# Altium PCB 四路输出继电器工控板.PCBDOC (part 2 of 2)
Units mm, origin at the board's own origin, x right, y up, seen from the top; angles counter-clockwise.
Board outline 152.4 x 101.6 mm, 2 copper layers (Top Layer, Bottom Layer); 59 components, 86 nets, 225 pads, 6 vias.
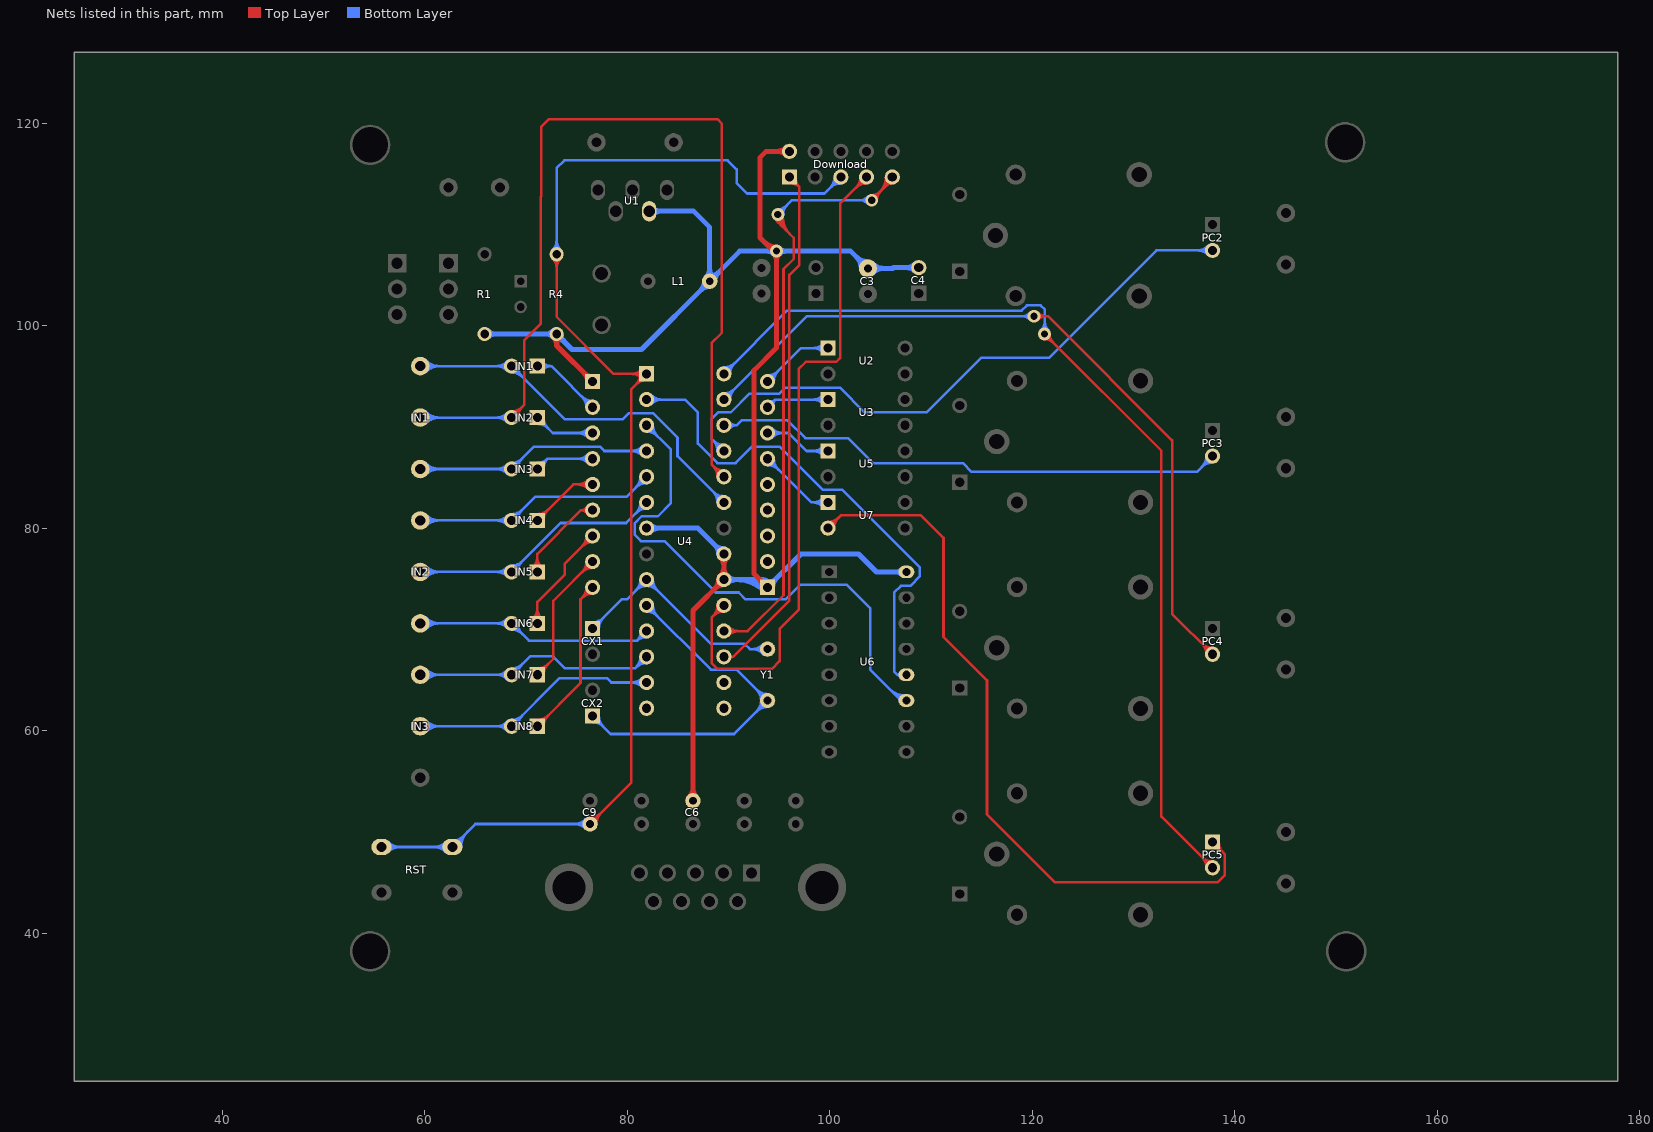
[diagram p2: the nets of this part, all layers, seen from the top]

## Via types
v1: diameter 1.27, hole 0.711, Top Layer to Bottom Layer, 6 vias

## Nets (pads, with @x,y where several pads share a name; then routed paths per layer and width w, separated by ;. In a path a pad name is that pad's centre, name@x,y a point inside that pad or via, vN(x,y) a via of type N, cw(c..) or ccw(c..) an arc to the next point about the centre after c; other vN are vias at no path point) (continued)
NetPC4_1: PC5.1 U7.2 | length 79.8
  Top Layer w0.254: U7.2@99.822,80.01 101.092,81.28 108.991,81.28 111.227,79.045 111.227,69.266 115.519,64.973 115.519,51.74 122.225,45.034 138.303,45.034 138.989,45.72 138.989,47.828 PC5.1@137.795,49.022 ; U7.2@99.822,80.379 ccw(c99.822,81.27) 100.452,80.64 ccw(c101.082,80.01) U7.2@100.191,80.01 ; U7.2@99.822,80.633 ccw(c99.822,82.137) 100.886,81.074 ccw(c101.949,80.01) U7.2@100.445,80.01 ; PC5.1@137.795,48.399 cw(c137.795,46.895) 138.859,47.958 cw(c139.922,49.022) PC5.1@138.418,49.022 ; PC5.1@137.795,48.653 cw(c137.795,47.762) 138.425,48.392 cw(c139.055,49.022) PC5.1@138.164,49.022
NetPD1_1: IN1.1@71.12,96.012 pad.2@76.581,91.948 | length 14.3
  Bottom Layer w0.254: IN1.1@71.12,96.012 72.517,96.012 ; IN1.1@71.395,95.765 cw(c71.947,95.269) 71.947,96.012 cw(c71.947,96.755) IN1.1@71.395,96.259 ; IN1.1@71.584,95.596 cw(c72.517,94.757) 72.517,96.012 ; IN1.1@71.584,96.428 ccw(c72.517,97.267) 72.517,96.012 ; pad.2@75.958,91.948 ccw(c74.454,91.948) 75.517,93.012 ccw(c76.581,94.075) pad.2@76.581,92.571 ; pad.2@76.212,91.948 ccw(c75.321,91.948) 75.951,92.578 ccw(c76.581,93.208) pad.2@76.581,92.317 ; pad.2@76.581,91.948 72.517,96.012
NetPD2_1: IN2.1@71.12,90.932 pad.3@76.581,89.408 | length 13.6
  Bottom Layer w0.254: IN2.1@71.12,90.309 cw(c71.12,88.805) 72.184,89.868 cw(c73.247,90.932) IN2.1@71.743,90.932 ; IN2.1@71.12,90.563 cw(c71.12,89.672) 71.75,90.302 cw(c72.38,90.932) IN2.1@71.489,90.932 ; IN2.1@71.12,90.932 72.644,89.408 pad.3@76.581,89.408 ; pad.3@76.14,88.967 ccw(c75.077,87.904) 75.077,89.408 ccw(c75.077,90.912) pad.3@76.14,89.849 ; pad.3@76.32,89.147 ccw(c75.69,88.517) 75.69,89.408 ccw(c75.69,90.299) pad.3@76.32,89.669
NetPD3_1: IN3.1@71.12,85.852 pad.4@76.581,86.868 | length 13.1
  Bottom Layer w0.254: IN3.1@71.12,85.852 72.136,86.868 ; IN3.1@71.132,86.221 ccw(c71.158,87.017) 71.722,86.454 ccw(c72.285,85.89) IN3.1@71.489,85.864 ; IN3.1@71.14,86.475 ccw(c71.185,87.819) 72.136,86.868 ; IN3.1@71.743,85.872 cw(c73.087,85.917) 72.136,86.868 ; pad.4@76.14,86.427 ccw(c75.077,85.364) 75.077,86.868 ccw(c75.077,88.372) pad.4@76.14,87.309 ; pad.4@76.32,86.607 ccw(c75.69,85.977) 75.69,86.868 ccw(c75.69,87.759) pad.4@76.32,87.129 ; pad.4@76.581,86.868 72.136,86.868
NetPD4_1: IN4.1 pad.5@76.581,84.328 | length 14.5
  Top Layer w0.254: IN4.1@71.12,80.772 74.676,84.328 pad.5@76.581,84.328 ; IN4.1@71.12,81.141 ccw(c71.12,82.032) 71.75,81.402 ccw(c72.38,80.772) IN4.1@71.489,80.772 ; IN4.1@71.12,81.395 ccw(c71.12,82.899) 72.184,81.836 ccw(c73.247,80.772) IN4.1@71.743,80.772 ; pad.5@76.14,83.887 ccw(c75.077,82.824) 75.077,84.328 ccw(c75.077,85.832) pad.5@76.14,84.769 ; pad.5@76.32,84.067 ccw(c75.69,83.437) 75.69,84.328 ccw(c75.69,85.219) pad.5@76.32,84.589
NetPD5_1: IN5.1 pad.6@76.581,81.788 | length 14.3
  Top Layer w0.254: IN5.1@70.679,76.133 ccw(c69.616,77.196) 71.12,77.196 ccw(c72.624,77.196) IN5.1@71.561,76.133 ; IN5.1@70.859,75.953 ccw(c70.229,76.583) 71.12,76.583 ccw(c72.011,76.583) IN5.1@71.381,75.953 ; IN5.1@71.12,75.692 71.12,77.47 75.438,81.788 ; pad.6@76.057,81.45 ccw(c75.438,81.051) 75.438,81.788 ; pad.6@76.057,82.126 cw(c75.438,82.525) 75.438,81.788 ; pad.6@76.581,81.788 75.438,81.788
NetPD6_1: IN6.1 pad.7@76.581,79.248 | length 18.4
  Top Layer w0.254: IN6.1@70.679,71.053 ccw(c69.616,72.116) 71.12,72.116 ccw(c72.624,72.116) IN6.1@71.561,71.053 ; IN6.1@70.859,70.873 ccw(c70.229,71.503) 71.12,71.503 ccw(c72.011,71.503) IN6.1@71.381,70.873 ; IN6.1@71.12,70.612 71.12,72.72 73.838,75.438 73.838,76.505 pad.7@76.581,79.248 ; pad.7@75.958,79.248 cw(c74.454,79.248) 75.517,78.184 cw(c76.581,77.121) pad.7@76.581,78.625 ; pad.7@76.212,79.248 cw(c75.321,79.248) 75.951,78.618 cw(c76.581,77.988) pad.7@76.581,78.879
NetPD7_1: IN7.1 pad.8@76.581,76.708 | length 21
  Top Layer w0.254: IN7.1@71.12,65.532 72.695,67.107 72.695,72.822 pad.8@76.581,76.708 ; IN7.1@71.12,65.901 ccw(c71.12,66.792) 71.75,66.162 ccw(c72.38,65.532) IN7.1@71.489,65.532 ; IN7.1@71.12,66.155 ccw(c71.12,67.659) 72.184,66.596 ccw(c73.247,65.532) IN7.1@71.743,65.532 ; pad.8@75.958,76.708 cw(c74.454,76.708) 75.517,75.644 cw(c76.581,74.581) pad.8@76.581,76.085 ; pad.8@76.212,76.708 cw(c75.321,76.708) 75.951,76.078 cw(c76.581,75.448) pad.8@76.581,76.339
NetPD8_1: IN8.1 pad.9@76.581,74.168 | length 23.5
  Top Layer w0.254: IN8.1@71.12,60.452 75.387,64.719 75.387,72.974 pad.9@76.581,74.168 ; IN8.1@71.12,60.821 ccw(c71.12,61.712) 71.75,61.082 ccw(c72.38,60.452) IN8.1@71.489,60.452 ; IN8.1@71.12,61.075 ccw(c71.12,62.579) 72.184,61.516 ccw(c73.247,60.452) IN8.1@71.743,60.452 ; pad.9@75.958,74.168 cw(c74.454,74.168) 75.517,73.104 cw(c76.581,72.041) pad.9@76.581,73.545 ; pad.9@76.212,74.168 cw(c75.321,74.168) 75.951,73.538 cw(c76.581,72.908) pad.9@76.581,73.799
PB0: U4.14
PB1: U4.15
PB2: U4.16
PB3: Download.1 U4.17 | length 55.6
  Top Layer w0.254: U4.17@89.535,67.31 90.457,67.31 ; U4.17@90.113,67.078 cw(c90.457,66.939) 90.457,67.31 ; U4.17@90.113,67.542 ccw(c90.457,67.681) 90.457,67.31 ; Download.1@96.012,114.681 96.993,113.7 ; Download.1@96.034,114.313 cw(c96.077,113.583) 96.593,114.1 cw(c97.11,114.616) Download.1@96.38,114.659 ; Download.1@96.049,114.059 cw(c96.121,112.828) 96.993,113.7 ; Download.1@96.634,114.644 ccw(c97.865,114.572) 96.993,113.7 ; 90.457,67.31 96.012,72.865 96.012,105.028 96.993,106.009 96.993,113.7
PB4: Download.9 U4.18 | length 79.3
  Top Layer w0.254: U4.18@89.535,69.85 91.889,69.85 95.428,73.389 95.428,105.582 96.439,106.593 96.439,108.661 94.818,110.282 v1@94.818,110.947 ; U4.18@89.796,69.589 cw(c90.426,68.959) 90.426,69.85 cw(c90.426,70.741) U4.18@89.796,70.111 ; U4.18@89.976,69.409 cw(c91.039,68.346) 91.039,69.85 cw(c91.039,71.354) U4.18@89.976,70.291 ; v1@94.616,111.023 ccw(c95.653,110.921) 94.916,110.184 ; v1@94.654,110.538 cw(c94.534,110.28) 94.818,110.28 cw(c95.051,110.28) v1@94.994,110.506 ; v1@94.818,110.998 v1@94.818,110.947 ; v1@95.122,110.973 ccw(c97.036,110.784) 95.676,109.424 ; 95.296,109.804 cw(c96.345,110.853) v1(94.869,110.998) v1@94.818,110.947 ; v1@95.375,110.948 ccw(c97.727,110.716) 96.056,109.045 ; v1(104.14,112.395) 106.299,114.554 Download.9@106.299,114.681 ; v1@104.14,112.903 ccw(c104.14,114.129) 105.007,113.262 ccw(c105.874,112.395) v1@104.648,112.395 ; 104.929,113.184 ccw(c103.432,114.681) Download.9@105.549,114.681 ; 105.362,113.617 ccw(c104.299,114.681) Download.9@105.803,114.681 ; 105.542,113.797 cw(c106.172,113.167) Download.9@106.172,114.058 ; Download.9@106.172,114.681 Download.9@106.299,114.681 ; Download.9@106.299,114.935 Download.9@106.299,114.681
  Bottom Layer w0.254: v1(94.869,110.998) 96.266,112.395 v1(104.14,112.395) ; v1@94.869,111.506 ccw(c94.869,112.732) 95.736,111.865 ccw(c96.603,110.998) v1@95.377,110.998 ; v1@103.781,112.036 ccw(c102.914,111.169) 102.914,112.395 ccw(c102.914,113.621) v1@103.781,112.754
PB5: Download.7 U4.19 | length 74.1
  Top Layer w0.254: U4.19@88.912,72.39 cw(c87.408,72.39) 88.471,71.326 cw(c89.535,70.263) U4.19@89.535,71.767 ; U4.19@89.166,72.39 cw(c88.275,72.39) 88.905,71.76 cw(c89.535,71.13) U4.19@89.535,72.021 ; U4.19@89.535,72.39 88.341,71.196 88.341,66.675 88.9,66.116 94.28,66.116 95.042,66.878 95.042,70.069 96.926,71.953 96.926,95.733 97.638,96.444 100.647,96.444 101.016,96.812 101.016,112.065 Download.7@103.632,114.681 ; Download.7@103.009,114.681 cw(c101.505,114.681) 102.568,113.617 cw(c103.632,112.554) Download.7@103.632,114.058 ; Download.7@103.263,114.681 cw(c102.372,114.681) 103.002,114.051 cw(c103.632,113.421) Download.7@103.632,114.312
PB6: CX1.1 U4.9 Y1.2 | length 37.3
  Bottom Layer w0.254: CX1.1@76.581,70.104 79.451,72.974 79.959,72.974 U4.9@81.915,74.93 88.265,68.58 91.592,68.58 92.1,68.072 Y1.2@93.853,68.072 ; CX1.1@76.581,70.473 ccw(c76.581,71.364) 77.211,70.734 ccw(c77.841,70.104) CX1.1@76.95,70.104 ; CX1.1@76.581,70.727 ccw(c76.581,72.231) 77.645,71.168 ccw(c78.708,70.104) CX1.1@77.204,70.104 ; U4.9@81.292,74.93 cw(c79.788,74.93) 80.851,73.866 cw(c81.915,72.803) 81.915,74.307 cw(c81.915,72.803) 82.979,73.866 cw(c84.042,74.93) U4.9@82.538,74.93 ; U4.9@81.546,74.93 cw(c80.655,74.93) 81.285,74.3 cw(c81.915,73.67) 81.915,74.561 cw(c81.915,73.67) 82.545,74.3 cw(c83.175,74.93) U4.9@82.284,74.93 ; Y1.2@93.404,67.623 ccw(c92.32,66.539) 92.32,68.072 ccw(c92.32,69.605) Y1.2@93.404,68.521 ; Y1.2@93.584,67.803 ccw(c92.933,67.152) 92.933,68.072 ccw(c92.933,68.992) Y1.2@93.584,68.341
PB7: CX2.1 U4.10 Y1.1 | length 50.4
  Bottom Layer w0.254: CX2.1@76.581,60.845 cw(c76.581,59.341) 77.645,60.404 cw(c78.708,61.468) CX2.1@77.204,61.468 ; CX2.1@76.581,61.099 cw(c76.581,60.208) 77.211,60.838 cw(c77.841,61.468) CX2.1@76.95,61.468 ; CX2.1@76.581,61.468 78.359,59.69 90.551,59.69 Y1.1@93.853,62.992 90.805,66.04 88.265,66.04 U4.10@81.915,72.39 ; U4.10@81.915,71.767 cw(c81.915,70.263) 82.979,71.326 cw(c84.042,72.39) U4.10@82.538,72.39 ; U4.10@81.915,72.021 cw(c81.915,71.13) 82.545,71.76 cw(c83.175,72.39) U4.10@82.284,72.39 ; Y1.1@93.853,62.357 ccw(c93.853,60.824) 92.769,61.908 ccw(c91.685,62.992) 93.218,62.992 ccw(c91.685,62.992) 92.769,64.076 ccw(c93.853,65.16) Y1.1@93.853,63.627 ; Y1.1@93.853,62.611 ccw(c93.853,61.691) 93.203,62.342 ccw(c92.552,62.992) 93.472,62.992 ccw(c92.552,62.992) 93.203,63.642 ccw(c93.853,64.293) Y1.1@93.853,63.373
PC0: IN1.1@59.563,96.012 IN1.2@68.58,96.012 U4.23 | length 53.4
  Bottom Layer w0.254: IN1.1@59.563,96.012 IN1.2@68.58,96.012 73.838,90.754 79.553,90.754 80.162,91.364 82.55,91.364 84.963,88.951 84.963,87.122 U4.23@89.535,82.55 ; IN1.1@59.938,95.637 cw(c60.845,94.73) 60.845,96.012 cw(c60.845,97.294) IN1.1@59.938,96.387 ; IN1.1@60.118,95.457 cw(c61.458,94.117) 61.458,96.012 cw(c61.458,97.907) IN1.1@60.118,96.567 ; IN1.2@68.139,95.571 ccw(c67.076,94.508) 67.076,96.012 ccw(c67.076,97.516) IN1.2@68.139,96.453 ; IN1.2@68.319,95.751 ccw(c67.689,95.121) 67.689,96.012 ccw(c67.689,96.903) IN1.2@68.319,96.273 ; IN1.2@68.58,95.389 cw(c68.58,93.885) 69.644,94.948 cw(c70.707,96.012) IN1.2@69.203,96.012 ; IN1.2@68.58,95.643 cw(c68.58,94.752) 69.21,95.382 cw(c69.84,96.012) IN1.2@68.949,96.012 ; U4.23@88.912,82.55 ccw(c87.408,82.55) 88.471,83.614 ccw(c89.535,84.677) U4.23@89.535,83.173 ; U4.23@89.166,82.55 ccw(c88.275,82.55) 88.905,83.18 ccw(c89.535,83.81) U4.23@89.535,82.919
PC1: IN1.2@59.563,90.932 IN2.2@68.58,90.932 U4.24 | length 109.3
  Top Layer w0.254: IN2.2@68.58,90.932 69.85,92.202 69.85,98.577 71.476,100.203 71.476,112.751 71.501,112.776 71.501,119.634 72.263,120.396 88.9,120.396 89.332,119.964 89.332,99.289 88.341,98.298 88.341,86.284 U4.24@89.535,85.09 ; IN2.2@68.58,91.301 ccw(c68.58,92.192) 69.21,91.562 ccw(c69.84,90.932) IN2.2@68.949,90.932 ; IN2.2@68.58,91.555 ccw(c68.58,93.059) 69.644,91.996 ccw(c70.707,90.932) IN2.2@69.203,90.932 ; U4.24@88.912,85.09 ccw(c87.408,85.09) 88.471,86.154 ccw(c89.535,87.217) U4.24@89.535,85.713 ; U4.24@89.166,85.09 ccw(c88.275,85.09) 88.905,85.72 ccw(c89.535,86.35) U4.24@89.535,85.459
  Bottom Layer w0.254: IN1.2@59.563,90.932 IN2.2@68.58,90.932 ; IN1.2@59.938,90.557 cw(c60.845,89.65) 60.845,90.932 cw(c60.845,92.214) IN1.2@59.938,91.307 ; IN1.2@60.118,90.377 cw(c61.458,89.037) 61.458,90.932 cw(c61.458,92.827) IN1.2@60.118,91.487 ; IN2.2@68.139,90.491 ccw(c67.076,89.428) 67.076,90.932 ccw(c67.076,92.436) IN2.2@68.139,91.373 ; IN2.2@68.319,90.671 ccw(c67.689,90.041) 67.689,90.932 ccw(c67.689,91.823) IN2.2@68.319,91.193
PC2: PC2.2 U4.25 | length 69.6
  Bottom Layer w0.254: U4.25@88.912,87.63 ccw(c87.408,87.63) 88.471,88.694 ccw(c89.535,89.757) U4.25@89.535,88.253 ; U4.25@89.166,87.63 ccw(c88.275,87.63) 88.905,88.26 ccw(c89.535,88.89) U4.25@89.535,87.999 ; U4.25@89.535,87.63 88.341,88.824 88.341,90.805 88.976,91.44 90.221,91.44 92.075,93.294 95.021,93.294 95.614,93.887 100.99,93.887 103.437,91.44 109.55,91.44 114.935,96.825 121.641,96.825 132.258,107.442 PC2.2@137.795,107.442 ; PC2.2@137.354,107.001 ccw(c136.291,105.938) 136.291,107.442 ccw(c136.291,108.946) PC2.2@137.354,107.883 ; PC2.2@137.534,107.181 ccw(c136.904,106.551) 136.904,107.442 ccw(c136.904,108.333) PC2.2@137.534,107.703
PC3: PC3.2 U4.26 | length 57.8
  Bottom Layer w0.254: U4.26@89.535,90.17 90.805,90.17 ; U4.26@89.827,89.944 cw(c90.287,89.588) 90.287,90.17 cw(c90.287,90.752) U4.26@89.827,90.396 ; U4.26@90.028,89.789 cw(c90.805,89.187) 90.805,90.17 ; U4.26@90.028,90.551 ccw(c90.805,91.153) 90.805,90.17 ; PC3.2@137.172,87.122 cw(c135.668,87.122) 136.731,86.058 cw(c137.795,84.995) PC3.2@137.795,86.499 ; PC3.2@137.426,87.122 cw(c136.535,87.122) 137.165,86.492 cw(c137.795,85.862) PC3.2@137.795,86.753 ; PC3.2@137.795,87.122 136.246,85.573 113.995,85.573 113.132,86.436 104.267,86.436 101.803,88.9 97.587,88.9 95.834,90.653 91.288,90.653 90.805,90.17
PC4: PC4.2 U4.27 | length 86.9
  Top Layer w0.254: v1(120.167,100.94) 121.535,100.94 133.807,88.667 133.807,71.552 PC4.2@137.795,67.564 ; v1@120.527,100.58 cw(c121.394,99.713) 121.394,100.94 cw(c121.394,102.166) v1@120.527,101.299 ; PC4.2@137.172,67.564 ccw(c135.668,67.564) 136.731,68.628 ccw(c137.795,69.691) PC4.2@137.795,68.187 ; PC4.2@137.426,67.564 ccw(c136.535,67.564) 137.165,68.194 ccw(c137.795,68.824) PC4.2@137.795,67.933
  Bottom Layer w0.254: U4.27@89.535,92.71 97.765,100.94 v1(120.167,100.94) ; U4.27@89.535,93.079 ccw(c89.535,93.97) 90.165,93.34 ccw(c90.795,92.71) U4.27@89.904,92.71 ; U4.27@89.535,93.333 ccw(c89.535,94.837) 90.599,93.774 ccw(c91.662,92.71) U4.27@90.158,92.71 ; v1@119.808,100.58 ccw(c118.941,99.713) 118.941,100.94 ccw(c118.941,102.166) v1@119.808,101.299
PC5: PC5.2 U4.28 | length 108.6
  Top Layer w0.254: v1@121.209,98.679 cw(c121.209,97.453) 122.076,98.32 cw(c122.943,99.187) v1@121.717,99.187 ; v1(121.209,99.187) 132.74,87.655 132.74,51.537 PC5.2@137.795,46.482 ; PC5.2@137.172,46.482 ccw(c135.668,46.482) 136.731,47.546 ccw(c137.795,48.609) PC5.2@137.795,47.105 ; PC5.2@137.426,46.482 ccw(c136.535,46.482) 137.165,47.112 ccw(c137.795,47.742) PC5.2@137.795,46.851
  Bottom Layer w0.254: U4.28@89.535,95.25 95.782,101.497 118.947,101.497 119.456,102.006 120.828,102.006 121.234,101.6 121.234,99.212 v1(121.209,99.187) ; U4.28@89.535,95.619 ccw(c89.535,96.51) 90.165,95.88 ccw(c90.795,95.25) U4.28@89.904,95.25 ; U4.28@89.535,95.873 ccw(c89.535,97.377) 90.599,96.314 ccw(c91.662,95.25) U4.28@90.158,95.25 ; v1@120.85,99.546 ccw(c119.921,100.475) 121.234,100.475 ; v1@121.029,99.367 ccw(c120.534,99.862) 121.234,99.862 ; 121.234,100.352 ccw(c122.374,100.352) v1@121.568,99.546
PC6: C9.1 Download.5 R4.1 RST.1 U4.1 | length 163.2
  Top Layer w0.254: R4.1@72.62,106.656 cw(c71.642,105.678) 73.025,105.678 cw(c74.408,105.678) R4.1@73.43,106.656 ; R4.1@72.799,106.835 cw(c72.255,106.291) 73.025,106.291 cw(c73.795,106.291) R4.1@73.251,106.835 ; R4.1@73.025,107.061 73.025,100.889 78.664,95.25 U4.1@81.915,95.25 80.391,93.726 80.391,54.864 C9.1@76.327,50.8 ; C9.1@76.327,51.181 ccw(c76.327,52.101) 76.977,51.45 ccw(c77.628,50.8) C9.1@76.708,50.8 ; C9.1@76.327,51.435 ccw(c76.327,52.968) 77.411,51.884 ccw(c78.495,50.8) C9.1@76.962,50.8 ; U4.1@81.292,95.25 cw(c79.788,95.25) 80.851,94.186 cw(c81.915,93.123) U4.1@81.915,94.627 ; U4.1@81.474,94.809 ccw(c80.411,93.746) 80.411,95.25 ccw(c80.411,96.754) U4.1@81.474,95.691 ; U4.1@81.546,95.25 cw(c80.655,95.25) 81.285,94.62 cw(c81.915,93.99) U4.1@81.915,94.881 ; U4.1@81.654,94.989 ccw(c81.024,94.359) 81.024,95.25 ccw(c81.024,96.141) U4.1@81.654,95.511
  Bottom Layer w0.254: RST.1@55.73,48.529 RST.1@62.73,48.529 65.001,50.8 C9.1@76.327,50.8 ; RST.1@56.226,48.233 cw(c56.942,47.517) 56.942,48.529 cw(c56.942,49.54) RST.1@56.226,48.825 ; RST.1@56.406,48.053 cw(c57.555,46.904) 57.555,48.529 cw(c57.555,50.154) RST.1@56.406,49.005 ; RST.1@62.054,48.053 ccw(c60.905,46.904) 60.905,48.529 ccw(c60.905,50.154) RST.1@62.054,49.005 ; RST.1@62.234,48.233 ccw(c61.518,47.517) 61.518,48.529 ccw(c61.518,49.54) RST.1@62.234,48.825 ; RST.1@62.93,49.202 ccw(c62.93,50.344) 63.737,49.536 ; RST.1@63.349,48.529 cw(c64.843,48.529) 63.787,49.585 ; RST.1@63.603,48.529 cw(c65.711,48.529) 64.22,50.019 ; R4.1@72.62,107.466 ccw(c71.642,108.444) 73.025,108.444 ccw(c74.408,108.444) R4.1@73.43,107.466 ; R4.1@72.799,107.287 ccw(c72.255,107.831) 73.025,107.831 ccw(c73.795,107.831) R4.1@73.251,107.287 ; R4.1@73.025,107.061 73.025,115.57 73.787,116.332 89.916,116.332 90.805,115.443 90.805,114.071 91.821,113.055 99.466,113.055 Download.5@101.092,114.681 ; C9.1@75.878,50.351 ccw(c74.794,49.267) 74.794,50.8 ccw(c74.794,52.333) C9.1@75.878,51.249 ; C9.1@76.058,50.531 ccw(c75.407,49.88) 75.407,50.8 ccw(c75.407,51.72) C9.1@76.058,51.069 ; Download.5@100.469,114.681 cw(c98.965,114.681) 100.028,113.617 cw(c101.092,112.554) Download.5@101.092,114.058 ; Download.5@100.723,114.681 cw(c99.832,114.681) 100.462,114.051 cw(c101.092,113.421) Download.5@101.092,114.312
PD0: U4.2 U6.12 | length 54.6
  Bottom Layer w0.254: U4.2@81.915,92.71 85.7,92.71 86.97,91.44 86.97,88.367 88.9,86.436 90.703,86.436 92.329,88.062 95.047,88.062 99.289,83.82 101.194,83.82 108.902,76.111 108.902,75.273 107.95,74.32 107.01,74.32 106.35,73.66 106.35,65.861 106.68,65.531 ; U4.2@82.176,92.449 cw(c82.806,91.819) 82.806,92.71 cw(c82.806,93.601) U4.2@82.176,92.971 ; U4.2@82.356,92.269 cw(c83.419,91.206) 83.419,92.71 cw(c83.419,94.214) U4.2@82.356,93.151 ; U6.12@106.937,65.354 ccw(c106.68,65.256) 106.68,65.531 ; U6.12@106.937,65.708 cw(c106.68,65.807) 106.68,65.531 ; U6.12@107.565,65.531 106.68,65.531
PD1: U4.3 U6.11 | length 60.1
  Bottom Layer w0.254: U4.3@81.915,89.547 cw(c81.915,88.043) 82.979,89.106 cw(c84.042,90.17) U4.3@82.538,90.17 ; U4.3@81.915,89.801 cw(c81.915,88.91) 82.545,89.54 cw(c83.175,90.17) U4.3@82.284,90.17 ; U4.3@81.915,90.17 84.303,87.782 84.303,82.474 83.016,81.187 81.427,81.187 80.721,80.481 80.721,79.375 81.356,78.74 83.668,78.74 88.748,73.66 91.008,73.66 91.694,72.974 95.631,72.974 97.079,74.422 101.676,74.422 104.013,72.085 104.013,66.015 107.037,62.991 U6.11@107.565,62.991 ; 105.927,64.1 ccw(c107.403,65.575) U6.11@107.403,63.489 ; 106.361,63.667 ccw(c107.403,64.708) U6.11@107.403,63.235 ; 106.795,63.233 ccw(c107.403,63.841) U6.11@107.403,62.981 ; 106.812,63.216 cw(c106.587,62.991) U6.11@106.905,62.991
PD2: IN1.3 IN3.2@68.58,85.852 U4.4 | length 39.7
  Bottom Layer w0.254: IN1.3@59.563,85.852 IN3.2@68.58,85.852 70.79,88.062 77.318,88.062 77.749,87.63 U4.4@81.915,87.63 ; IN1.3@59.938,85.477 cw(c60.845,84.57) 60.845,85.852 cw(c60.845,87.134) IN1.3@59.938,86.227 ; IN1.3@60.118,85.297 cw(c61.458,83.957) 61.458,85.852 cw(c61.458,87.747) IN1.3@60.118,86.407 ; IN3.2@68.139,85.411 ccw(c67.076,84.348) 67.076,85.852 ccw(c67.076,87.356) IN3.2@68.139,86.293 ; IN3.2@68.319,85.591 ccw(c67.689,84.961) 67.689,85.852 ccw(c67.689,86.743) IN3.2@68.319,86.113 ; IN3.2@68.58,86.221 ccw(c68.58,87.112) 69.21,86.482 ccw(c69.84,85.852) IN3.2@68.949,85.852 ; IN3.2@68.58,86.475 ccw(c68.58,87.979) 69.644,86.916 ccw(c70.707,85.852) IN3.2@69.203,85.852 ; U4.4@81.474,87.189 ccw(c80.411,86.126) 80.411,87.63 ccw(c80.411,89.134) U4.4@81.474,88.071 ; U4.4@81.654,87.369 ccw(c81.024,86.739) 81.024,87.63 ccw(c81.024,88.521) U4.4@81.654,87.891
PD3: IN2.1@59.563,80.772 IN4.2 U4.5 | length 40.4
  Bottom Layer w0.254: IN2.1@59.563,80.772 IN4.2@68.58,80.772 70.942,83.134 79.959,83.134 U4.5@81.915,85.09 ; IN2.1@59.938,80.397 cw(c60.845,79.49) 60.845,80.772 cw(c60.845,82.054) IN2.1@59.938,81.147 ; IN2.1@60.118,80.217 cw(c61.458,78.877) 61.458,80.772 cw(c61.458,82.667) IN2.1@60.118,81.327 ; IN4.2@68.139,80.331 ccw(c67.076,79.268) 67.076,80.772 ccw(c67.076,82.276) IN4.2@68.139,81.213 ; IN4.2@68.319,80.511 ccw(c67.689,79.881) 67.689,80.772 ccw(c67.689,81.663) IN4.2@68.319,81.033 ; IN4.2@68.58,81.141 ccw(c68.58,82.032) 69.21,81.402 ccw(c69.84,80.772) IN4.2@68.949,80.772 ; IN4.2@68.58,81.395 ccw(c68.58,82.899) 69.644,81.836 ccw(c70.707,80.772) IN4.2@69.203,80.772 ; U4.5@81.292,85.09 cw(c79.788,85.09) 80.851,84.026 cw(c81.915,82.963) U4.5@81.915,84.467 ; U4.5@81.546,85.09 cw(c80.655,85.09) 81.285,84.46 cw(c81.915,83.83) U4.5@81.915,84.721
PD4: IN2.2@59.563,75.692 IN5.2 U4.6 | length 41.5
  Bottom Layer w0.254: IN2.2@59.563,75.692 IN5.2@68.58,75.692 73.406,80.518 79.883,80.518 U4.6@81.915,82.55 ; IN2.2@59.938,75.317 cw(c60.845,74.41) 60.845,75.692 cw(c60.845,76.974) IN2.2@59.938,76.067 ; IN2.2@60.118,75.137 cw(c61.458,73.797) 61.458,75.692 cw(c61.458,77.587) IN2.2@60.118,76.247 ; IN5.2@68.139,75.251 ccw(c67.076,74.188) 67.076,75.692 ccw(c67.076,77.196) IN5.2@68.139,76.133 ; IN5.2@68.319,75.431 ccw(c67.689,74.801) 67.689,75.692 ccw(c67.689,76.583) IN5.2@68.319,75.953 ; IN5.2@68.58,76.061 ccw(c68.58,76.952) 69.21,76.322 ccw(c69.84,75.692) IN5.2@68.949,75.692 ; IN5.2@68.58,76.315 ccw(c68.58,77.819) 69.644,76.756 ccw(c70.707,75.692) IN5.2@69.203,75.692 ; U4.6@81.292,82.55 cw(c79.788,82.55) 80.851,81.486 cw(c81.915,80.423) U4.6@81.915,81.927 ; U4.6@81.546,82.55 cw(c80.655,82.55) 81.285,81.92 cw(c81.915,81.29) U4.6@81.915,82.181
PD5: IN2.3 IN6.2 U4.11 | length 39
  Bottom Layer w0.254: IN2.3@59.563,70.612 IN6.2@68.58,70.612 70.282,68.91 80.975,68.91 ; IN2.3@59.938,70.237 cw(c60.845,69.33) 60.845,70.612 cw(c60.845,71.894) IN2.3@59.938,70.987 ; IN2.3@60.118,70.057 cw(c61.458,68.717) 61.458,70.612 cw(c61.458,72.507) IN2.3@60.118,71.167 ; IN6.2@68.139,70.171 ccw(c67.076,69.108) 67.076,70.612 ccw(c67.076,72.116) IN6.2@68.139,71.053 ; IN6.2@68.319,70.351 ccw(c67.689,69.721) 67.689,70.612 ccw(c67.689,71.503) IN6.2@68.319,70.873 ; IN6.2@68.58,69.989 cw(c68.58,68.485) 69.644,69.548 cw(c70.707,70.612) IN6.2@69.203,70.612 ; IN6.2@68.58,70.243 cw(c68.58,69.352) 69.21,69.982 cw(c69.84,70.612) IN6.2@68.949,70.612 ; U4.11@81.295,69.793 cw(c80.193,69.692) 80.975,68.91 ; U4.11@81.548,69.816 cw(c80.895,69.757) 81.358,69.293 cw(c81.822,68.83) U4.11@81.881,69.483 ; U4.11@81.858,69.23 ccw(c81.757,68.128) 80.975,68.91 ; U4.11@81.915,69.85 80.975,68.91
PD6: IN3.1@59.563,65.532 IN7.2 U4.12 | length 40.4
  Bottom Layer w0.254: IN3.1@59.563,65.532 IN7.2@68.58,65.532 70.409,67.361 72.669,67.361 73.863,66.167 80.772,66.167 U4.12@81.915,67.31 ; IN3.1@59.938,65.157 cw(c60.845,64.25) 60.845,65.532 cw(c60.845,66.814) IN3.1@59.938,65.907 ; IN3.1@60.118,64.977 cw(c61.458,63.637) 61.458,65.532 cw(c61.458,67.427) IN3.1@60.118,66.087 ; IN7.2@68.139,65.091 ccw(c67.076,64.028) 67.076,65.532 ccw(c67.076,67.036) IN7.2@68.139,65.973 ; IN7.2@68.319,65.271 ccw(c67.689,64.641) 67.689,65.532 ccw(c67.689,66.423) IN7.2@68.319,65.793 ; IN7.2@68.58,65.901 ccw(c68.58,66.792) 69.21,66.162 ccw(c69.84,65.532) IN7.2@68.949,65.532 ; IN7.2@68.58,66.155 ccw(c68.58,67.659) 69.644,66.596 ccw(c70.707,65.532) IN7.2@69.203,65.532 ; U4.12@81.292,67.31 cw(c79.788,67.31) 80.851,66.246 cw(c81.915,65.183) U4.12@81.915,66.687 ; U4.12@81.546,67.31 cw(c80.655,67.31) 81.285,66.68 cw(c81.915,66.05) U4.12@81.915,66.941
PD7: IN3.2@59.563,60.452 IN8.2 U4.13 | length 40.8
  Bottom Layer w0.254: IN3.2@59.563,60.452 IN8.2@68.58,60.452 73.33,65.202 78.003,65.202 78.435,64.77 U4.13@81.915,64.77 ; IN3.2@59.938,60.077 cw(c60.845,59.17) 60.845,60.452 cw(c60.845,61.734) IN3.2@59.938,60.827 ; IN3.2@60.118,59.897 cw(c61.458,58.557) 61.458,60.452 cw(c61.458,62.347) IN3.2@60.118,61.007 ; IN8.2@68.139,60.011 ccw(c67.076,58.948) 67.076,60.452 ccw(c67.076,61.956) IN8.2@68.139,60.893 ; IN8.2@68.319,60.191 ccw(c67.689,59.561) 67.689,60.452 ccw(c67.689,61.343) IN8.2@68.319,60.713 ; IN8.2@68.58,60.821 ccw(c68.58,61.712) 69.21,61.082 ccw(c69.84,60.452) IN8.2@68.949,60.452 ; IN8.2@68.58,61.075 ccw(c68.58,62.579) 69.644,61.516 ccw(c70.707,60.452) IN8.2@69.203,60.452 ; U4.13@81.474,64.329 ccw(c80.411,63.266) 80.411,64.77 ccw(c80.411,66.274) U4.13@81.474,65.211 ; U4.13@81.654,64.509 ccw(c81.024,63.879) 81.024,64.77 ccw(c81.024,65.661) U4.13@81.654,65.031
Q1: pad.9@93.853,94.488 U2.1 | length 14.9
  Bottom Layer w0.254: pad.9@93.853,94.488 97.155,97.79 U2.1@99.822,97.79 ; pad.9@93.853,94.857 ccw(c93.853,95.748) 94.483,95.118 ccw(c95.113,94.488) pad.9@94.222,94.488 ; pad.9@93.853,95.111 ccw(c93.853,96.615) 94.917,95.552 ccw(c95.98,94.488) pad.9@94.476,94.488 ; U2.1@99.381,97.349 ccw(c98.318,96.286) 98.318,97.79 ccw(c98.318,99.294) U2.1@99.381,98.231 ; U2.1@99.561,97.529 ccw(c98.931,96.899) 98.931,97.79 ccw(c98.931,98.681) U2.1@99.561,98.051
Q2: pad.8@93.853,91.948 U3.1 | length 11.3
  Bottom Layer w0.254: pad.8@93.853,91.948 94.615,92.71 ; pad.8@94.015,92.55 ccw(c94.176,93.149) 94.615,92.71 ; pad.8@94.455,92.11 cw(c95.054,92.271) 94.615,92.71 ; U3.1@99.381,92.269 ccw(c98.318,91.206) 98.318,92.71 ccw(c98.318,94.214) U3.1@99.381,93.151 ; U3.1@99.561,92.449 ccw(c98.931,91.819) 98.931,92.71 ccw(c98.931,93.601) U3.1@99.561,92.971 ; U3.1@99.822,92.71 94.615,92.71
Q3: pad.7@93.853,89.408 U5.1 | length 14.2
  Bottom Layer w0.254: pad.7@93.853,89.408 95.936,89.408 97.714,87.63 U5.1@99.822,87.63 ; pad.7@94.114,89.147 cw(c94.744,88.517) 94.744,89.408 cw(c94.744,90.299) pad.7@94.114,89.669 ; pad.7@94.294,88.967 cw(c95.357,87.904) 95.357,89.408 cw(c95.357,90.912) pad.7@94.294,89.849 ; U5.1@99.381,87.189 ccw(c98.318,86.126) 98.318,87.63 ccw(c98.318,89.134) U5.1@99.381,88.071 ; U5.1@99.561,87.369 ccw(c98.931,86.739) 98.931,87.63 ccw(c98.931,88.521) U5.1@99.561,87.891
Q4: pad.6@93.853,86.868 U7.1 | length 15.3
  Bottom Layer w0.254: pad.6@93.853,86.245 cw(c93.853,84.741) 94.917,85.804 cw(c95.98,86.868) pad.6@94.476,86.868 ; pad.6@93.853,86.499 cw(c93.853,85.608) 94.483,86.238 cw(c95.113,86.868) pad.6@94.222,86.868 ; pad.6@93.853,86.868 98.171,82.55 U7.1@99.822,82.55 ; U7.1@99.381,82.109 ccw(c98.318,81.046) 98.318,82.55 ccw(c98.318,84.054) U7.1@99.381,82.991 ; U7.1@99.561,82.289 ccw(c98.931,81.659) 98.931,82.55 ccw(c98.931,83.441) U7.1@99.561,82.811
Q5: pad.5@93.853,84.328
Q6: pad.4@93.853,81.788
Q7: pad.3@93.853,79.248
Q8: pad.2@93.853,76.708
VCC: C3.1 C4.2 C6.2 Download.2 L1.2 pad.1@76.581,94.488 pad.1@93.853,74.168 R1.2 R4.2 U1.4 U4.7 U4.20 U4.21 U6.16 | length 226.3
  Top Layer w0.5: R4.2@72.707,98.869 cw(c71.939,98.101) 73.025,98.101 cw(c74.111,98.101) R4.2@73.343,98.869 ; R4.2@73.025,99.187 73.025,98.044 pad.1@76.581,94.488 ; pad.1@76.081,94.488 ccw(c74.874,94.488) 75.727,95.342 ccw(c76.581,96.195) pad.1@76.581,94.988 ; U1.4@82.169,111.311 82.169,111.455 82.194,111.455 U1.4@82.194,111.335 ; C6.2@86.125,53.448 ccw(c85.251,54.322) 86.487,54.322 ccw(c87.723,54.322) C6.2@86.849,53.448 ; C6.2@86.487,53.086 86.487,71.882 U4.20@89.535,74.93 U4.21@89.535,77.47 ; U4.20@89.035,74.93 cw(c87.828,74.93) 88.681,74.076 cw(c89.535,73.223) U4.20@89.535,74.43 ; U4.20@89.181,75.284 ccw(c88.328,76.137) 89.535,76.137 ccw(c90.742,76.137) U4.20@89.889,75.284 ; U4.21@89.181,77.116 cw(c88.328,76.263) 89.535,76.263 cw(c90.742,76.263) U4.21@89.889,77.116 ; pad.1@93.353,74.168 ccw(c92.146,74.168) 92.999,75.022 ccw(c93.853,75.875) pad.1@93.853,74.668 ; 93.564,108.239 ccw(c94.742,109.416) v1@94.742,107.751 ; pad.1@93.853,74.168 92.532,75.489 92.532,95.606 94.742,97.815 v1(94.742,107.366) 94.437,107.366 93.091,108.712 93.091,116.586 93.726,117.221 Download.2@96.012,117.221 ; v1@94.47,107.094 cw(c93.813,106.436) 94.742,106.436 cw(c95.671,106.436) v1@95.014,107.094 ; Download.2@95.658,116.867 ccw(c94.805,116.014) 94.805,117.221 ccw(c94.805,118.428) Download.2@95.658,117.575
  Bottom Layer w0.5: R1.2@65.913,99.187 R4.2@73.025,99.187 74.549,97.663 81.407,97.663 L1.2@88.138,104.394 ; R1.2@66.231,98.869 cw(c66.999,98.101) 66.999,99.187 cw(c66.999,100.273) R1.2@66.231,99.505 ; R4.2@72.707,98.869 ccw(c71.939,98.101) 71.939,99.187 ccw(c71.939,100.273) R4.2@72.707,99.505 ; R4.2@73.025,98.737 cw(c73.025,97.651) 73.793,98.419 cw(c74.561,99.187) R4.2@73.475,99.187 ; U4.7@81.915,80.01 86.995,80.01 U4.21@89.535,77.47 ; U1.4@82.169,111.311 86.555,111.311 88.138,109.728 L1.2@88.138,104.394 ; U4.7@82.269,79.656 cw(c83.122,78.803) 83.122,80.01 cw(c83.122,81.217) U4.7@82.269,80.364 ; U1.4@82.487,110.993 cw(c83.255,110.225) 83.255,111.311 cw(c83.255,112.397) U1.4@82.487,111.629 ; L1.2@87.626,104.394 cw(c86.39,104.394) 87.264,103.52 cw(c88.138,102.646) L1.2@88.138,103.882 ; L1.2@87.776,104.756 ccw(c86.902,105.63) 88.138,105.63 ccw(c89.374,105.63) L1.2@88.5,104.756 ; L1.2@88.138,104.906 ccw(c88.138,106.142) 89.012,105.268 ccw(c89.886,104.394) L1.2@88.65,104.394 ; U4.21@89.035,77.47 ccw(c87.828,77.47) 88.681,78.324 ccw(c89.535,79.177) U4.21@89.535,77.97 ; U4.20@89.535,74.93 93.091,74.93 ; U4.20@89.889,74.576 cw(c90.742,73.723) 90.742,74.93 cw(c90.742,76.137) U4.20@89.889,75.284 ; 90.806,74.93 cw(c90.806,71.121) pad.1@93.499,73.814 ; 92.013,74.93 cw(c92.013,72.328) pad.1@93.853,74.168 ; 93.22,74.93 cw(c93.22,73.535) pad.1@94.207,74.522 ; pad.1@93.355,74.21 ccw(c92.447,74.286) 93.091,74.93 ; pad.1@93.811,74.666 cw(c93.735,75.574) 93.091,74.93 ; pad.1@93.853,74.668 ccw(c93.853,75.875) 94.707,75.022 ccw(c95.56,74.168) pad.1@94.353,74.168 ; v1@94.47,107.094 ccw(c93.813,106.436) 93.813,107.366 ccw(c93.813,108.295) v1@94.47,107.638 ; v1@95.014,107.094 cw(c95.671,106.436) 95.671,107.366 cw(c95.671,108.295) v1@95.014,107.638 ; C3.1@103.109,105.664 ccw(c101.54,105.664) 102.649,106.774 ccw(c103.759,107.883) C3.1@103.759,106.314 ; C3.1@104.219,105.204 cw(c105.328,104.095) 105.328,105.664 cw(c105.328,107.233) C3.1@104.219,106.124 ; U6.16@107.138,75.426 ccw(c106.497,74.786) 106.497,75.691 ccw(c106.497,76.596) U6.16@107.138,75.956 ; U6.16@107.565,75.691 104.623,75.691 102.844,77.47 97.155,77.47 pad.1@93.853,74.168 ; C4.2@108.435,105.387 ccw(c107.581,104.533) 107.581,105.74 ccw(c107.581,106.947) C4.2@108.435,106.094 ; C4.2@108.788,105.74 106.299,105.74 106.223,105.664 C3.1@103.759,105.664 102.057,107.366 v1(94.742,107.366) 91.11,107.366 L1.2@88.138,104.394 ; 93.091,74.93 pad.1@93.853,74.168
pads on no net: ?.0 Download.3 J1.1 J1.4 J1.6 J1.7 J1.8 J1.9 J1.10 J1.11 K1.2 K2.2 K3.2 K4.2 KEY1.3 KEY1.4 U6.7 U6.8 U6.9 U6.10

## Polygon pours and split planes (outlines as drawn)
no net on Top Layer (hatched 45Degree grid 0.508 track 0.203): 51.689,119.126 53.135,120.65 110.871,120.65 110.871,35.687 53.135,35.687 51.81,37.084 51.81,119.38 52.051,119.38

## Silkscreen, mask and mechanical layers (free items; w line width, h text height)
Top Overlay:
  lines w0.2: 75.311,72.898 75.311,95.758 77.851,95.758 77.851,72.898 75.311,72.898 ; 92.583,72.898 92.583,95.758 95.123,95.758 95.123,72.898 92.583,72.898
  text "VCC" at 60.833,119.253 h1.02
  text "GND" at 66.675,119.253 h1.02
  text "IN1" at 52.832,97.028 h1.02 r270
  text "IN2" at 52.832,92.075 h1.02 r270
  text "IN3" at 52.832,86.868 h1.02 r270
  text "IN4" at 52.832,82.042 h1.02 r270
  text "IN5" at 52.832,76.835 h1.02 r270
  text "IN6" at 52.832,71.755 h1.02 r270
  text "IN7" at 52.832,66.675 h1.02 r270
  text "IN8" at 52.832,61.722 h1.02 r270
  text "GND" at 52.832,56.515 h1.02 r270
Mechanical 1:
  lines w0.4: 51.181,36.83 53.086,34.925 152.146,35.052 154.051,36.957 154.051,119.507 152.146,121.412 52.959,121.412 51.181,119.634 51.217,36.794

## Text inside footprints (layer, text, board x,y; h text height)
Download: Top Overlay "10" at 107.696,116.713 h1.02; Top Overlay "9" at 107.696,114.173 h1.02; Top Overlay "1" at 92.456,114.554 h1.02; Top Overlay "2" at 93.472,116.713 h1.02
J1: Top Overlay "6" at 91.396,40.027 h1.02 r180; Top Overlay "9" at 83.086,40.027 h1.02 r180; Top Overlay "5" at 78.994,46.482 h1.02 r180; Top Overlay "1" at 95.25,46.736 h1.02 r180